# Altium PCB Arduino-RedBoard.PcbDoc
Units mm, origin at the board's own origin, x right, y up, seen from the top; angles counter-clockwise.
Board outline 68.6 x 53.3 mm, 2 copper layers (Top Layer, Bottom Layer); 51 components, 48 nets, 188 pads, 4 vias.
Unrouted connection lines stored in the file: 123.
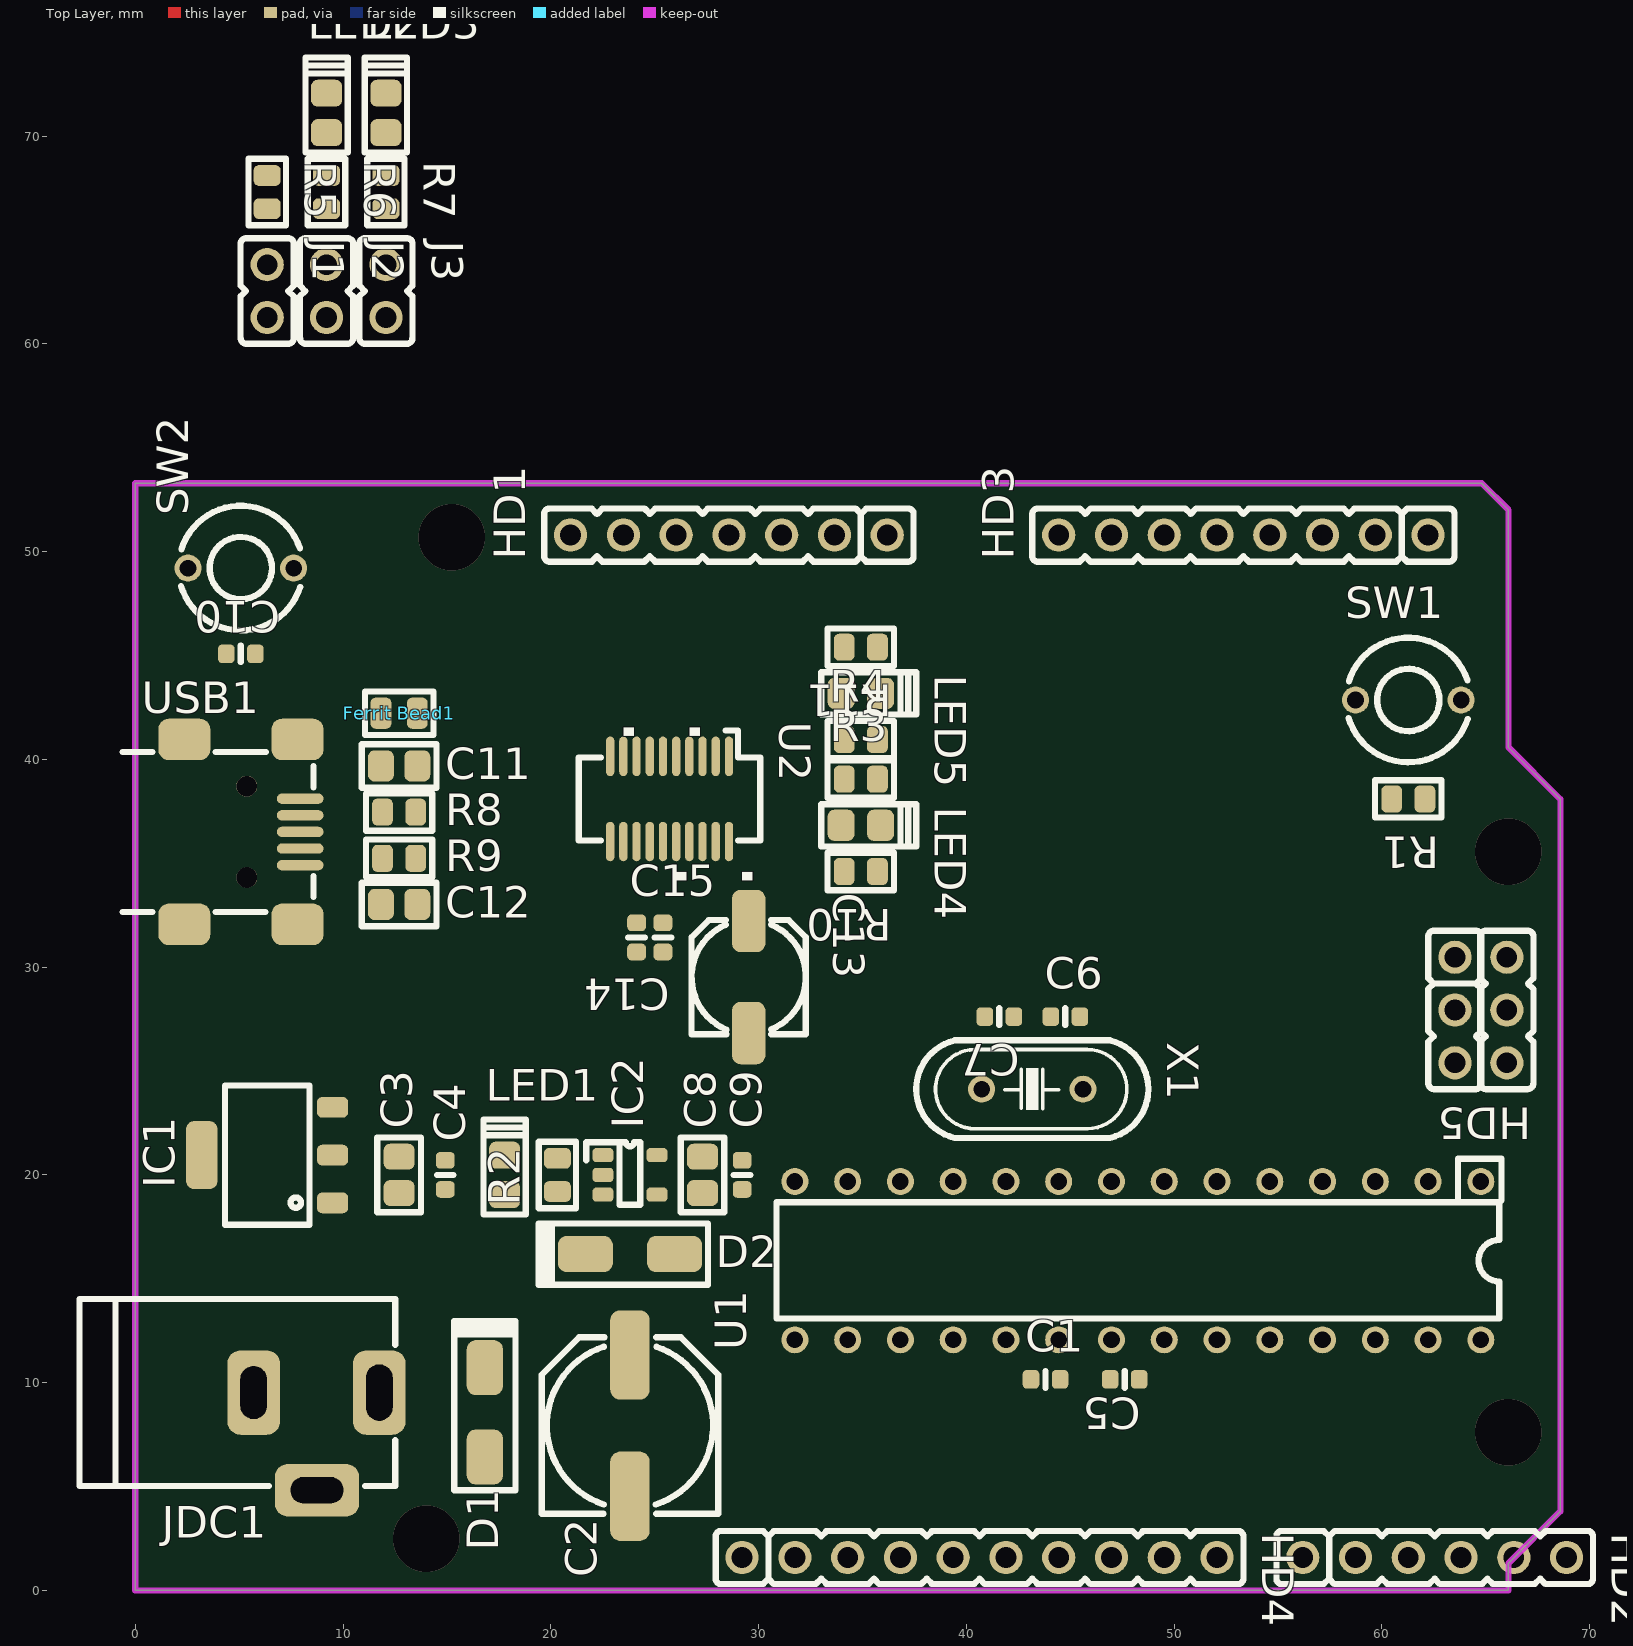
[diagram p0: Top Layer view]
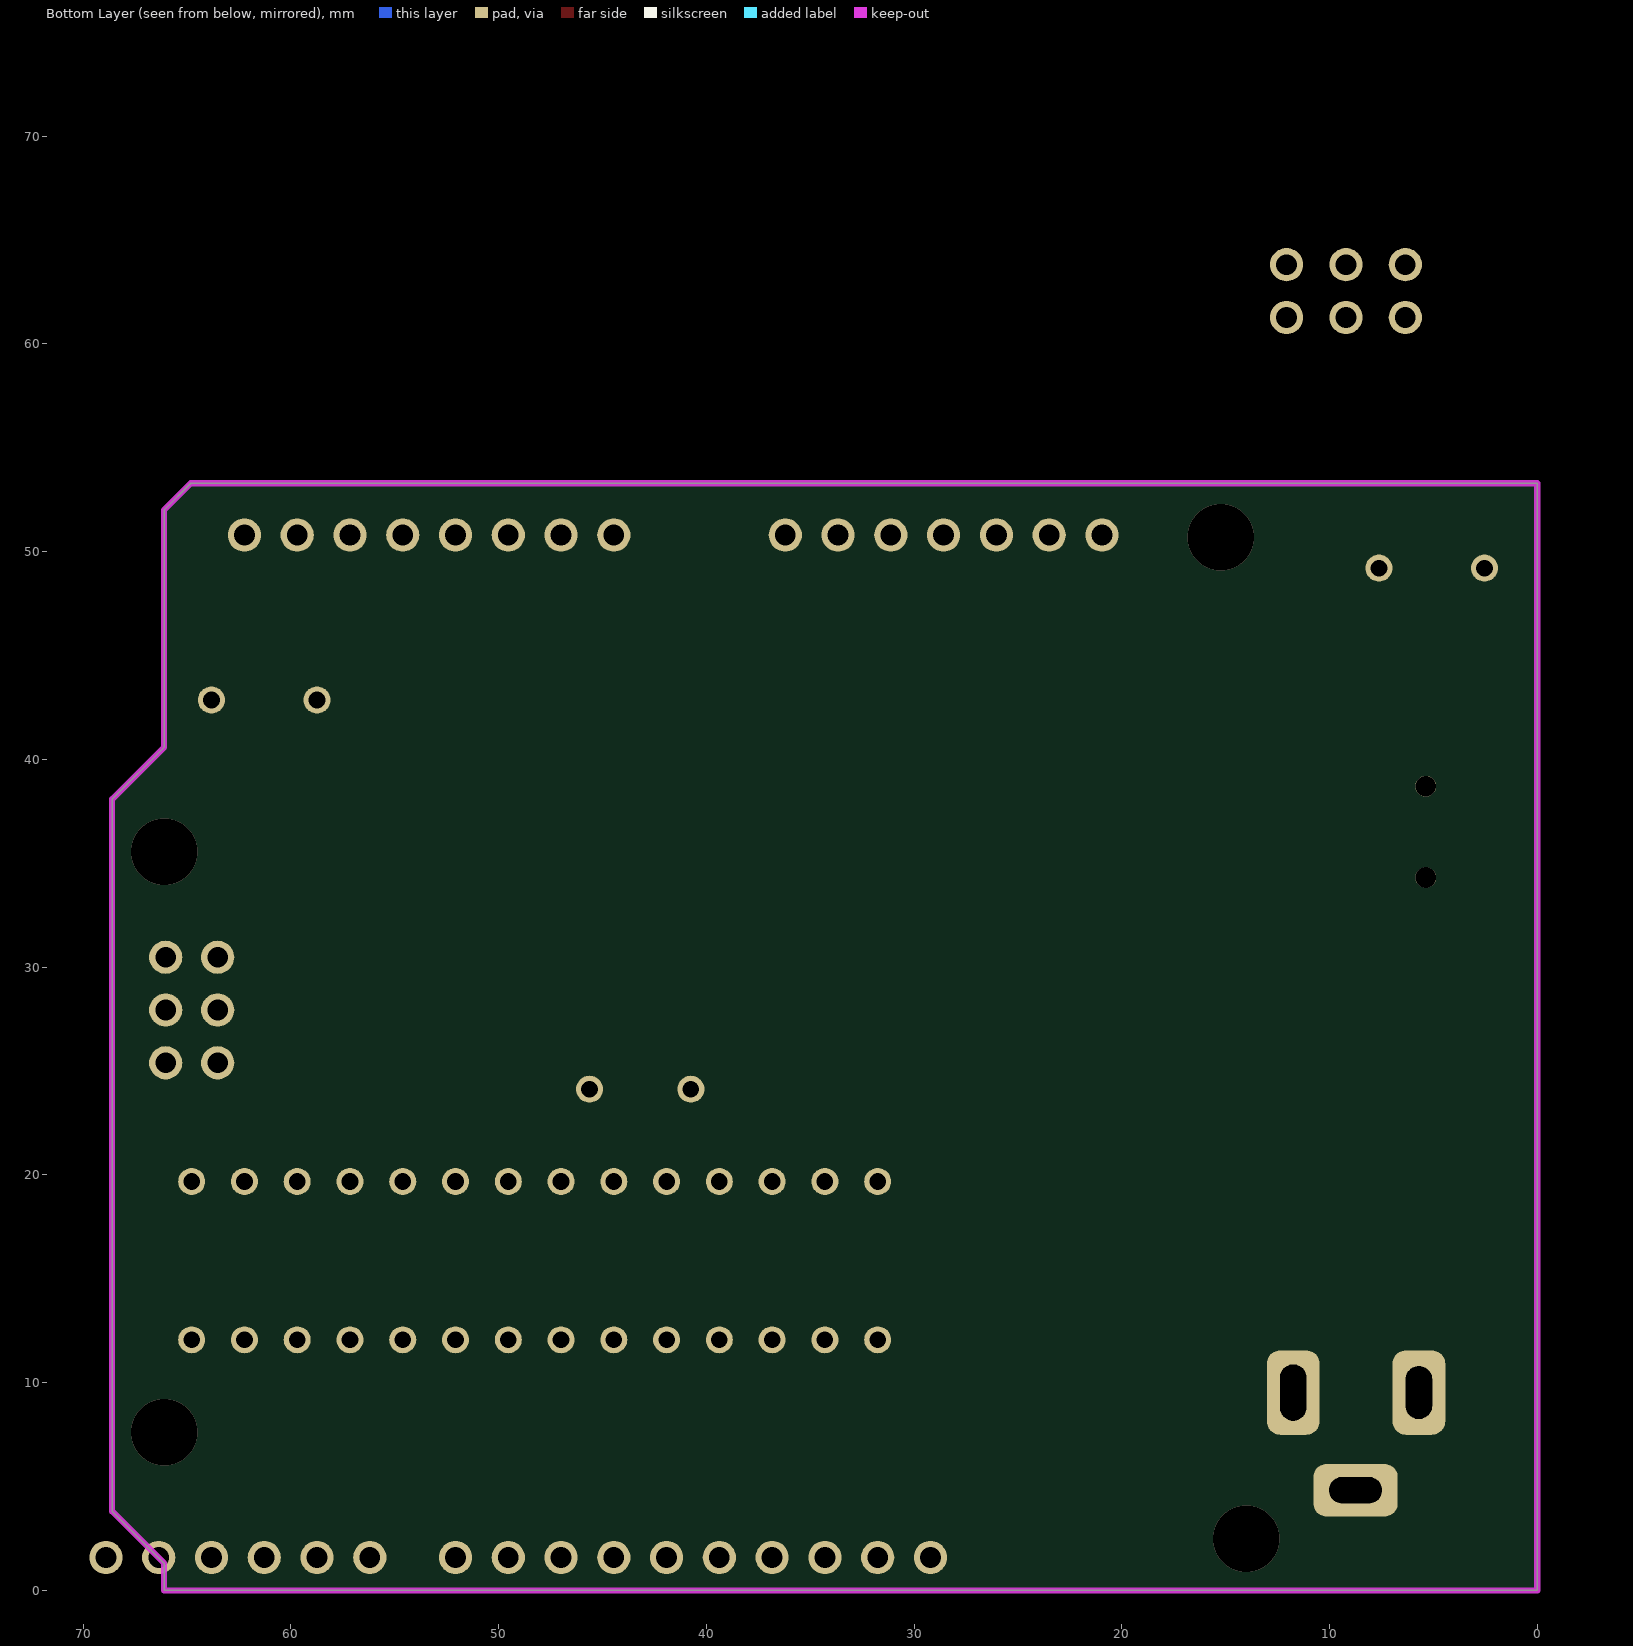
[diagram p1: Bottom Layer view, seen from below]

## Layer stack, top to bottom
Top Layer: signal copper 0.0356
Dielectric: dielectric 0.32, FR-4, Dk 4.8
Bottom Layer: signal copper 0.0356

## Board outline
0,0 66.1,0 66.1,1.31 68.6,3.81 68.6,38.08 66.1,40.58 66.1,52.01 64.81,53.3 0,53.3 0,0

## Design rules (kind name [scope] priority, off if disabled: settings)
Clearance [All] p1: gap=0.254
PolygonConnect [All] p1: connectstyle=Relief reliefconductorwidth=0.254 reliefentries=4 polygonreliefangle="90 Angle"
RoutingVias [All] p1: holewidth=0.711 width=1.27 viastyle="Through Hole" minholewidth=0.711 minwidth=1.27 maxholewidth=0.711 maxwidth=1.27
SilkscreenOverComponentPads [All] p1: minsilkscreentomaskgap=0.254
SolderMaskExpansion [All] p1: expansion=0.102
Width [All] p1: maxlimit=0.254 minlimit=0.254 preferedwidth=0.254
27 further rules are at their usual default settings.

## Components (designator, comment, footprint, x,y, rotation, side; value= is the part's Value field where it differs from the comment)
C1 "5AK102KABAA" C0603 43.815,10.16 r0 top
C2 "47uF/25V" C_FK_47UF_25V 23.812,7.938 r270 top
C3 "10uF/16V" C0805 12.7,20.002 r270 top
C4 "100nF" C0603 14.922,20.002 r90 top
C5 "5AK102KABAA" C0603 47.625,10.16 r180 top
C6 "5AK102KABAA" C0603 44.767,27.622 r0 top
C7 "5AK102KABAA" C0603 41.593,27.622 r180 top
C8 "10uF" C0805 27.305,20.002 r270 top
C9 "100nF" C0603 29.21,20.002 r90 top
C10 "100nF" C0603 5.08,45.085 r0 top
C11 "47pF" C0805 12.7,39.688 r180 top
C12 "47pF" C0805 12.7,33.02 r180 top
C13 "47uF/16V" C_FK_47UF_16V 29.527,29.527 r270 top
C14 "100nF" C0603 25.4,31.432 r270 top
C15 "100nF" C0603 24.13,31.432 r90 top
D1 "SS14" SS14 16.828,8.572 r90 top
D2 "SS14" SS14 23.812,16.192 r180 top
"Ferrit Bead1" "600mA" CB2012 12.7,42.227 r0 top
HD1 "POWER" Header_7 28.575,50.8 r180 top
HD2 "AD" Header_6 62.547,1.587 r0 top
HD3 "IOL" Header_8 53.34,50.8 r180 top
HD4 "IOH" Header_10 40.64,1.587 r0 top
HD5 "ISP" Header_3x2 64.77,27.94 r270 top
IC1 "AMS1117 (5V)" AMS1117-5.0V 6.35,20.955 r90 top
IC2 "MIC5205" MIC5205 23.812,20.002 r270 top
J1 "Short Jump" Header_2 6.35,62.547 r270 top
J2 "Short Jump" Header_2 9.207,62.547 r270 top
J3 "Short Jump" Header_2 12.065,62.547 r270 top
JDC1 "Jack DC" DC-IN 11.747,9.525 r0 top
LED1 "Orange" "Led 0805Y" 17.78,20.002 r90 top
LED2 "Green" "Led 0805G" 9.207,71.12 r90 top
LED3 "Red" "Led 0805R" 12.065,71.12 r90 top
LED4 "Yellow" "Led 0805Y" 34.925,36.83 r0 top
LED5 "Blue" "Led 0805BL" 34.925,43.18 r0 top
R1 "Res2" RESC2012L 61.277,38.1 r180 top
R2 "Res2" RESC2012L 20.32,20.002 r90 top
R3 "Res2" RESC2012L 34.925,39.052 r0 top
R4 "Res2" RESC2012L 34.925,40.957 r0 top
R5 "Res2" RESC2012L 6.35,67.31 r270 top
R6 "Res2" RESC2012L 9.207,67.31 r270 top
R7 "Res2" RESC2012L 12.065,67.31 r270 top
R8 "Res2" RESC2012L 12.7,37.465 r180 top
R9 "Res2" RESC2012L 12.7,35.242 r180 top
R10 "Res2" RESC2012L 34.925,34.608 r180 top
R11 "Res2" RESC2012L 34.925,45.402 r180 top
SW1 "RESET" "BUTTON 2PIN TRON" 58.737,42.862 r0 top
SW2 "RESET" "BUTTON 2PIN TRON" 2.54,49.212 r0 top
U1 "ATmega328 (DIP)" "ATmega328 (DIP)" 64.77,19.685 r180 top
U2 "FT231X (SSOP)" "SSOP 20" 25.717,38.1 r270 top
USB1 "USB Mini" USBMNIB 7.938,36.512 r270 top
X1 "12Mhz" CRYSTAL 43.18,24.13 r0 top

## Footprints (in the part's own frame and the unit in brackets; to place one, negate y for a bottom-side part, rotate by r counter-clockwise, add the part's x,y. Pads: shape width x height; smd on the part's side, far side on the other; paste and mask are expansions set on the pad)
AMS1117-5.0V [mm] "SOT223, 4-Leads, Body 6.7x7.3mm (max), Pitch 2.30mm, IPC Medium Density"
  rrect50% 1x1.5 smd: 1(-2.3,-3.15) 2(0,-3.15) 3(2.3,-3.15)
  rrect50% 3.28x1.5 smd: 4(0,3.15)
  silkscreen extent -3.35,-2.03 3.35,2.03, body extent -3.25,-3.54 3.25,3.54, height 1.65
"ATmega328 (DIP)" [mm] "DIP 28, W7.62, Picth 2.54"
  round 1.3 hole 0.8: 1(0,0) 2(2.54,0) 3(5.08,0) 4(7.62,0) 5(10.16,0) 6(12.7,0) 7(15.24,0) 8(17.78,0) 9(20.32,0) 10(22.86,0) 11(25.4,0) 12(27.94,0) 13(30.48,0) 14(33.02,0) 15(33.02,7.62) 16(30.48,7.62) 17(27.94,7.62) 18(25.4,7.62) 19(22.86,7.62) 20(20.32,7.62) 21(17.78,7.62) 22(15.24,7.62) 23(12.7,7.62) 24(10.16,7.62) 25(7.62,7.62) 26(5.08,7.62) 27(2.54,7.62) 28(0,7.62)
  silkscreen extent -1,-1.1 33.91,6.6, body extent -1.4,-0.03 34.6,7.84, height 5.08
"BUTTON 2PIN TRON" [mm] "PIN TO PIN 5.08, W=6MM"
  round 1.3 hole 0.8: 1(0,0) 2(5.08,0)
  silkscreen extent -0.33,-3 5.4,3
C0603 [mm] "Chip Capacitor, Body 1.6x0.8mm, 1608"
  rrect50% 0.8x0.9 smd: 1(-0.7,0) 2(0.7,0)
  silkscreen extent 0,-0.4 0,0.4, body extent -0.8,-0.4 0.8,0.4, height 0.6
C0805 [mm] "Chip Capacitor, 2-Leads, Body 2.0x1.3mm, IPC Medium Density"
  rrect50% 1.25x1.5 smd: 1(-0.875,0) 2(0.875,0)
  silkscreen extent -1.8,-1.05 1.8,1.05, body extent -1,-0.6 1,0.6, height 0.95
C_FK_47UF_16V [mm] "ALUMINUM CAPACITOR 5.5x5.5x6.1mm"
  rrect50% 3x1.6 smd mask+0.1: 1(-2.7,0) 2(2.7,0)
  silkscreen extent -2.75,-2.75 2.75,2.75, body extent -3.64,-3.29 3.66,3.31, height 5.9
C_FK_47UF_25V [mm] "ALUMINUM CAPACITOR 8.5x8.5x6.5mm"
  rrect50% 4.3x1.9 smd mask+0.1: 1(-3.4,0) 2(3.4,0)
  silkscreen extent -4.25,-4.25 4.25,4.25, body extent -4.5,-4.15 4.5,4.15, height 6.9
CB2012 [mm] "Ferrite Beads 2-Leads, Body 2.3x1.45mm, Ferrit Bead"
  rrect50% 1x1.5 smd: 1(-0.875,0) 2(0.875,0)
  silkscreen extent -1.64,-1.05 1.65,1.05, body extent -1,-0.6 1,0.6, height 0.95
CRYSTAL [mm] "Quartz Crystal, Thru-Hole; 2 Leads; Body 11.35 x 4.65 x 13.46 mm (LxWxH max)"
  round 1.3 hole 0.8 mask+0.1: 1(-2.44,0) 2(2.44,0)
  silkscreen extent -5.59,-2.35 5.59,2.35, body extent -5.49,-2.25 5.49,2.25, height 3.6
DC-IN [mm] "Jac DC input"
  rrect50% 2.54x4.064 hole 1.27 slot 2.7 at 90 deg: 1(0,0)
  rrect50% 2.54x4.064 hole 1.27 slot 2.54 at 90 deg: 2(-6.05,0)
  rrect50% 4.064x2.54 hole 1.27 slot 2.54 at 0 deg: 3(-3,-4.7)
  silkscreen extent -14.43,-4.5 0.77,4.5, body extent -14.06,-4.76 -0.23,4.75, height 11.02
Header_2 [mm] "Connector DIP, 2Pin_2.54mm"
  round 1.6 hole 1 mask+0.1: 1(-1.27,0) 2(1.27,0)
  silkscreen extent -2.54,-1.28 2.54,1.28, body extent -2.54,-1.27 2.54,1.27, height 10.1
Header_3x2 [mm] "Connector DIP, 2x3Pin_2.54mm"
  round 1.6 hole 1 mask+0.1: 1(-2.54,-1.25) 2(0,-1.25) 3(2.54,-1.25) 4(-2.54,1.25) 5(0,1.25) 6(2.54,1.25)
  silkscreen extent -3.81,-2.53 3.81,2.53, body extent -3.81,-2.54 3.81,2.54, height 8.45
Header_6 [mm] "Connector DIP Male, 6Pin_2.54mm"
  round 1.6 hole 1 mask+0.1: 1(-6.35,0) 2(-3.81,0) 3(-1.27,0) 4(1.27,0) 5(3.81,0) 6(6.35,0)
  silkscreen extent -7.62,-1.28 7.62,1.28, body extent -7.62,-1.27 7.62,1.27, height 10.1
Header_7 [mm] "Connector DIP Male, 7Pin_2.54mm"
  round 1.6 hole 1 mask+0.1: 1(-7.62,0) 2(-5.08,0) 3(-2.54,0) 4(0,0) 5(2.54,0) 6(5.08,0) 7(7.62,0)
  silkscreen extent -8.89,-1.28 8.89,1.28, body extent -8.89,-1.27 8.89,1.27, height 10.1
Header_8 [mm] "Connector DIP Male, 8Pin_2.54mm"
  round 1.6 hole 1 mask+0.1: 1(-8.89,0) 2(-6.35,0) 3(-3.81,0) 4(-1.27,0) 5(1.27,0) 6(3.81,0) 7(6.35,0) 8(8.89,0)
  silkscreen extent -10.16,-1.28 10.16,1.28, body extent -10.16,-1.27 10.16,1.27, height 10.1
Header_10 [mm] "Connector DIP Male, 10Pin_2.54mm"
  round 1.6 hole 1 mask+0.1: 1(-11.43,0) 2(-8.89,0) 3(-6.35,0) 4(-3.81,0) 5(-1.27,0) 6(1.27,0) 7(3.81,0) 8(6.35,0) 9(8.89,0) 10(11.43,0)
  silkscreen extent -12.7,-1.28 12.7,1.28, body extent -12.7,-1.27 12.7,1.27, height 10.1
"Led 0805BL" [mm] "Chip LED; BLUE ; Body 2.0 x 1.3 mm (LxW typ)"
  rrect50% 1.3x1.5 smd: 1(-0.95,0) 2(0.95,0)
  silkscreen extent -1.91,-1.02 2.67,1.02, body extent -1.01,-0.63 1.01,0.62, height 1.1
"Led 0805G" [mm] "Chip LED; Green; Body 2.0 x 1.3 mm (LxW typ)"
  rrect50% 1.3x1.5 smd: 1(-0.95,0) 2(0.95,0)
  silkscreen extent -1.91,-1.02 2.67,1.02, body extent -1.04,-0.62 0.98,0.62, height 1.1
"Led 0805R" [mm] "Chip LED; RED ; Body 2.0 x 1.3 mm (LxW typ)"
  rrect50% 1.3x1.5 smd: 1(-0.95,0) 2(0.95,0)
  silkscreen extent -1.91,-1.02 2.67,1.02, body extent -1.01,-0.63 1.01,0.62, height 1.1
"Led 0805Y" [mm] "Chip LED; Yellow; Body 2.0 x 1.3 mm (LxW typ)"
  rrect50% 1.3x1.5 smd: 1(-0.95,0) 2(0.95,0)
  silkscreen extent -1.91,-1.02 2.67,1.02, body extent -1.01,-0.63 1.01,0.62, height 1.1
MIC5205 [mm] "5 PIN - 0.95mm"
  rrect50% 0.68x1 smd mask+0.1: 1(-0.95,-1.3) 2(0,-1.3) 3(0.95,-1.3) 4(0.95,1.3) 5(-0.95,1.3)
  silkscreen extent -1.58,-2.1 1.44,0.5, body extent -1.5,-1.25 1.5,1.25, height 1.05
RESC2012L [mm] "Chip Resistor, Body 2.0x1.3mm, 1/8W 0805"
  rrect50% 1x1.3 smd: 1(-0.8,0) 2(0.8,0)
  silkscreen extent -1.6,-0.9 1.6,0.9, body extent -1,-0.62 1,0.63, height 0.6
SS14 [mm] "Diode SMD"
  rrect50% 2.65x1.75 smd: 1(-2.15,0) 2(2.15,0)
  silkscreen extent -3.75,-1.48 4.4,1.48, body extent -2.5,-1.35 2.5,1.35, height 2.15
"SSOP 20" [mm] "20-Pin Small Outline Package 1.27 mm Pitch"
  oval 1.9x0.4 smd mask+0.05: 1(-2.05,2.857) 2(-2.05,2.222) 3(-2.05,1.587) 4(-2.05,0.952) 5(-2.05,0.317) 6(-2.05,-0.318) 7(-2.05,-0.953) 8(-2.05,-1.588) 9(-2.05,-2.223) 10(-2.05,-2.858) 11(2.05,-2.857) 12(2.05,-2.222) 13(2.05,-1.587) 14(2.05,-0.952) 15(2.05,-0.317) 16(2.05,0.318) 17(2.05,0.953) 18(2.05,1.588) 19(2.05,2.223) 20(2.05,2.858)
  silkscreen extent -3.3,-4.37 2,4.37
USBMNIB [mm] "9.2mmX7.75mm"
  oval 0.5x2.25 smd: 1(-1.6,0) 2(-0.8,0) 3(0,0) 4(0.8,0) 5(1.6,0)
  rrect50% 2x2.5 smd: 6(-4.45,-0.125) 7(4.45,-0.125) 8(-4.45,-5.575) 9(4.45,-5.575)
  round 1 hole 1 mask+0.1: HOLE1(-2.2,-2.57) HOLE2(2.2,-2.57)
  silkscreen extent -3.85,-8.55 3.85,0.64, body extent -5.35,-8.52 5.35,0.68, height 3.95

## Part data
C1 C5 C6 C7: "CAP NPO CAPNTO 1nF 100V 10%"
C2 C13: library part CP1
C3 C8: library part CP1, "Cap P  0,1uF < 22uF , 16 - 50V"
C4 C9 C10 C11 C12 C14 C15: library part CN2, "Cap np 104 => 105pF"
D1 D2: library part D1A, "Diode 1A"
"Ferrit Bead1": library part Res2, "Ferrit Bead"
HD1: library part Hed7, "Header 7"
HD2: library part Hed6, "Header 6"
HD3: library part Hed8, "Hedear 8"
HD4: library part Hed10, "Header 10"
HD5: library part HED3x2, "Header 3x2"
IC1: library part AMS1117, "1A LOW DROPOUT VOLTAGE REGULATOR"
IC2: "150mA Low  -  Noise LDO Regulator"
J1 J2 J3: library part ShortJump
JDC1: library part DCIN, "Jac DC input"
LED1 LED2 LED3 LED4 LED5: library part LED, "LED Single colour Green and Red"
R1 R2 R3 R4 R5 R6 R7 R8 R9 R10 R11: "Resistor"
SW1 SW2: library part SW2, "Switch button 2 pin"
U1: library part ATmega328_1, "Atmel 8-bit Microcontroller"
U2: library part FT231X, "FT231Z (SSOP) - USB to UART"
USB1: library part USB_M
X1: library part XT2, "Crystal For all Crystal 2pin."

## Via types
v1: diameter 3.2, hole 3.2, Top Layer to Bottom Layer, 4 vias

## Nets (pads, with @x,y where several pads share a name; then routed paths per layer and width w, separated by ;. In a path a pad name is that pad's centre, name@x,y a point inside that pad or via, vN(x,y) a via of type N, cw(c..) or ccw(c..) an arc to the next point about the centre after c; other vN are vias at no path point)
3V3: C8.1 C9.2 C15.2 HD1.2 IC2.5 U2.3 U2.13 U2.14
5V: C1.2 C3.1 C4.2 D2.2 HD1.3 HD1.4 IC1.2 IC2.1 IC2.3 LED4.1 LED5.1 R1.2 R2.2 U1.7 U1.20
AD0: HD2.1 U1.23
AD1: HD2.2 U1.24
AD2: HD2.3 U1.25
AD3: HD2.4 U1.26
AD4/SDA: HD2.5 HD4.9 U1.27
AD5/SCL: HD2.6 HD4.10 U1.28
AREF: C5.2 HD4.8 U1.21
D+: C12.2 R9.2 USB1.3
D-: C11.2 R8.2 USB1.2
GND: C1.1 C2.2 C3.2 C4.1 C5.1 C6.1 C7.1 C8.2 C9.1 C10.1 C11.1 C12.1 C13.2 C14.2 C15.1 HD1.5 HD1.6 HD4.7 HD5.6 IC1.1 IC2.2 JDC1.2 JDC1.3 LED1.2 LED2.2 LED3.2 SW1.1 SW2.1 U1.8 U1.22 U2.6 U2.16 USB1.5
IO2/PUSH: C10.2 HD3.3 R5.1 SW2.2 U1.4
IO3: HD3.4 U1.5
IO4: HD3.5 U1.6
IO5: HD3.6 U1.11
IO6: HD3.7 U1.12
IO7: HD3.8 U1.13
IO8: HD4.1 U1.14
IO9: HD4.2 U1.15
MISO/LED1: HD4.5 HD5.1 J3.2 U1.18
MOSI: HD4.4 HD5.5 U1.17
NetC6_2: C6.2 U1.9 X1.2
NetC7_2: C7.2 U1.10 X1.1
NetD1_1: D1.1 JDC1.1
"NetFerrit Bead1_1": "Ferrit Bead1.1" USB1.1
NetJ1_1: J1.1 R5.2
NetJ2_1: J2.1 R6.2
NetJ3_1: J3.1 R7.2
NetLED1_1: LED1.1 R2.1
NetLED2_1: LED2.1 R6.1
NetLED3_1: LED3.1 R7.1
NetLED4_2: LED4.2 R10.1
NetLED5_2: LED5.2 R11.1
NetR3_1: R3.1 U2.20
NetR4_1: R4.1 U2.4
NetR8_1: R8.1 U2.12
NetR9_1: R9.1 U2.11
NetR10_2: R10.2 U2.17
NetR11_2: R11.2 U2.10
RESET: HD1.1 HD5.3 R1.1 SW1.2 U1.1
RX-I: HD3.1 R3.2 U1.2
SCK/LED0: HD4.6 HD5.2 J2.2 U1.19
SS: HD4.3 U1.16
TX-O: HD3.2 R4.2 U1.3
VBUS: "Ferrit Bead1.2" C13.1 C14.1 D2.1 U2.15
VCC: HD5.4 J1.2
VIN: C2.1 D1.2 HD1.7 IC1.3
pads on no net: IC1.4 IC2.4 U2.1 U2.2 U2.5 U2.7 U2.8 U2.9 U2.18 U2.19 USB1.4 USB1.6 USB1.7 USB1.8 USB1.9 USB1.HOLE1 USB1.HOLE2
copper on no net:
  other v1: 14,2.5 66.1,7.62 66.1,35.56 15.24,50.7

## Keep-outs
Keep-Out Layer:
  lines w0.3: 66.04,0 0,0 0,53.3 64.81,53.3 66.1,52.01 66.1,40.58 68.6,38.08 68.6,3.81 66.1,1.31 66.1,1.27 66.1,0

## Text inside footprints (layer, text, board x,y; h text height)
C2: Mechanical 1 "+" at 22.313,11.777 h3 r270
C13: Mechanical 1 "+" at 28.028,32.167 h3 r270
HD1: Mechanical 1 "1" at 36.375,51.2 h1.2 r180; Mechanical 1 "7" at 21.125,51.2 h1.2 r180
HD2: Mechanical 1 "1" at 55.948,1.187 h1.2; Mechanical 1 "6" at 68.648,1.187 h1.2
HD3: Mechanical 1 "8" at 44.74,51.2 h1.2 r180; Mechanical 1 "1" at 62.44,51.2 h1.2 r180
HD4: Mechanical 1 "10" at 51.54,1.188 h1.2; Mechanical 1 "1" at 29.04,1.188 h1.2
HD5: Mechanical 1 "3" at 65.766,25.654 h1.2 r270; Mechanical 1 "1" at 65.766,30.734 h1.2 r270; Mechanical 1 "1" at 63.266,30.734 h1.2 r270; Mechanical 1 "3" at 63.266,25.654 h1.2 r270
IC1: Mechanical 1 "3" at 7.925,22.845 h1.2 r90; Mechanical 1 "2" at 7.925,20.64 h1.2 r90; Mechanical 1 "1" at 7.925,18.435 h1.2 r90
IC2: Mechanical 1 "5" at 24.212,21.103 h0.4 r270; Mechanical 1 "4" at 24.212,19.202 h0.4 r270; Mechanical 1 "3" at 23.012,19.202 h0.4 r270; Mechanical 1 "1" at 23.013,21.053 h0.4 r270
J1: Mechanical 1 "2" at 6.096,61.531 h1.2 r270; Mechanical 1 "1" at 6.096,64.072 h1.2 r270
J2: Mechanical 1 "2" at 8.954,61.531 h1.2 r270; Mechanical 1 "1" at 8.954,64.072 h1.2 r270
J3: Mechanical 1 "2" at 11.811,61.531 h1.2 r270; Mechanical 1 "1" at 11.811,64.072 h1.2 r270
U1: Mechanical 1 "1" at 64.86,18.875 h1.2 r180; Mechanical 1 "14" at 32.66,18.875 h1.2 r180; Mechanical 1 "15" at 32.86,14.075 h1.2 r180; Mechanical 1 "28" at 65.26,14.175 h1.2 r180
USB1: Mechanical 1 "5" at 5.397,35.242 h1.2 r270; Mechanical 1 "1" at 5.397,38.291 h1.2 r270